# Altium PCB Offset_Attenuator.PcbDoc
Units mil, origin at the board's own origin, x right, y up, seen from the top; angles counter-clockwise.
Board outline 1968.5 x 2234.13 mil, 2 copper layers (M1 Top, M4 Bottom), stack 47.244 mil thick; 33 components, 14 nets, 81 pads, 37 vias.
Unrouted connection lines stored in the file: 11.
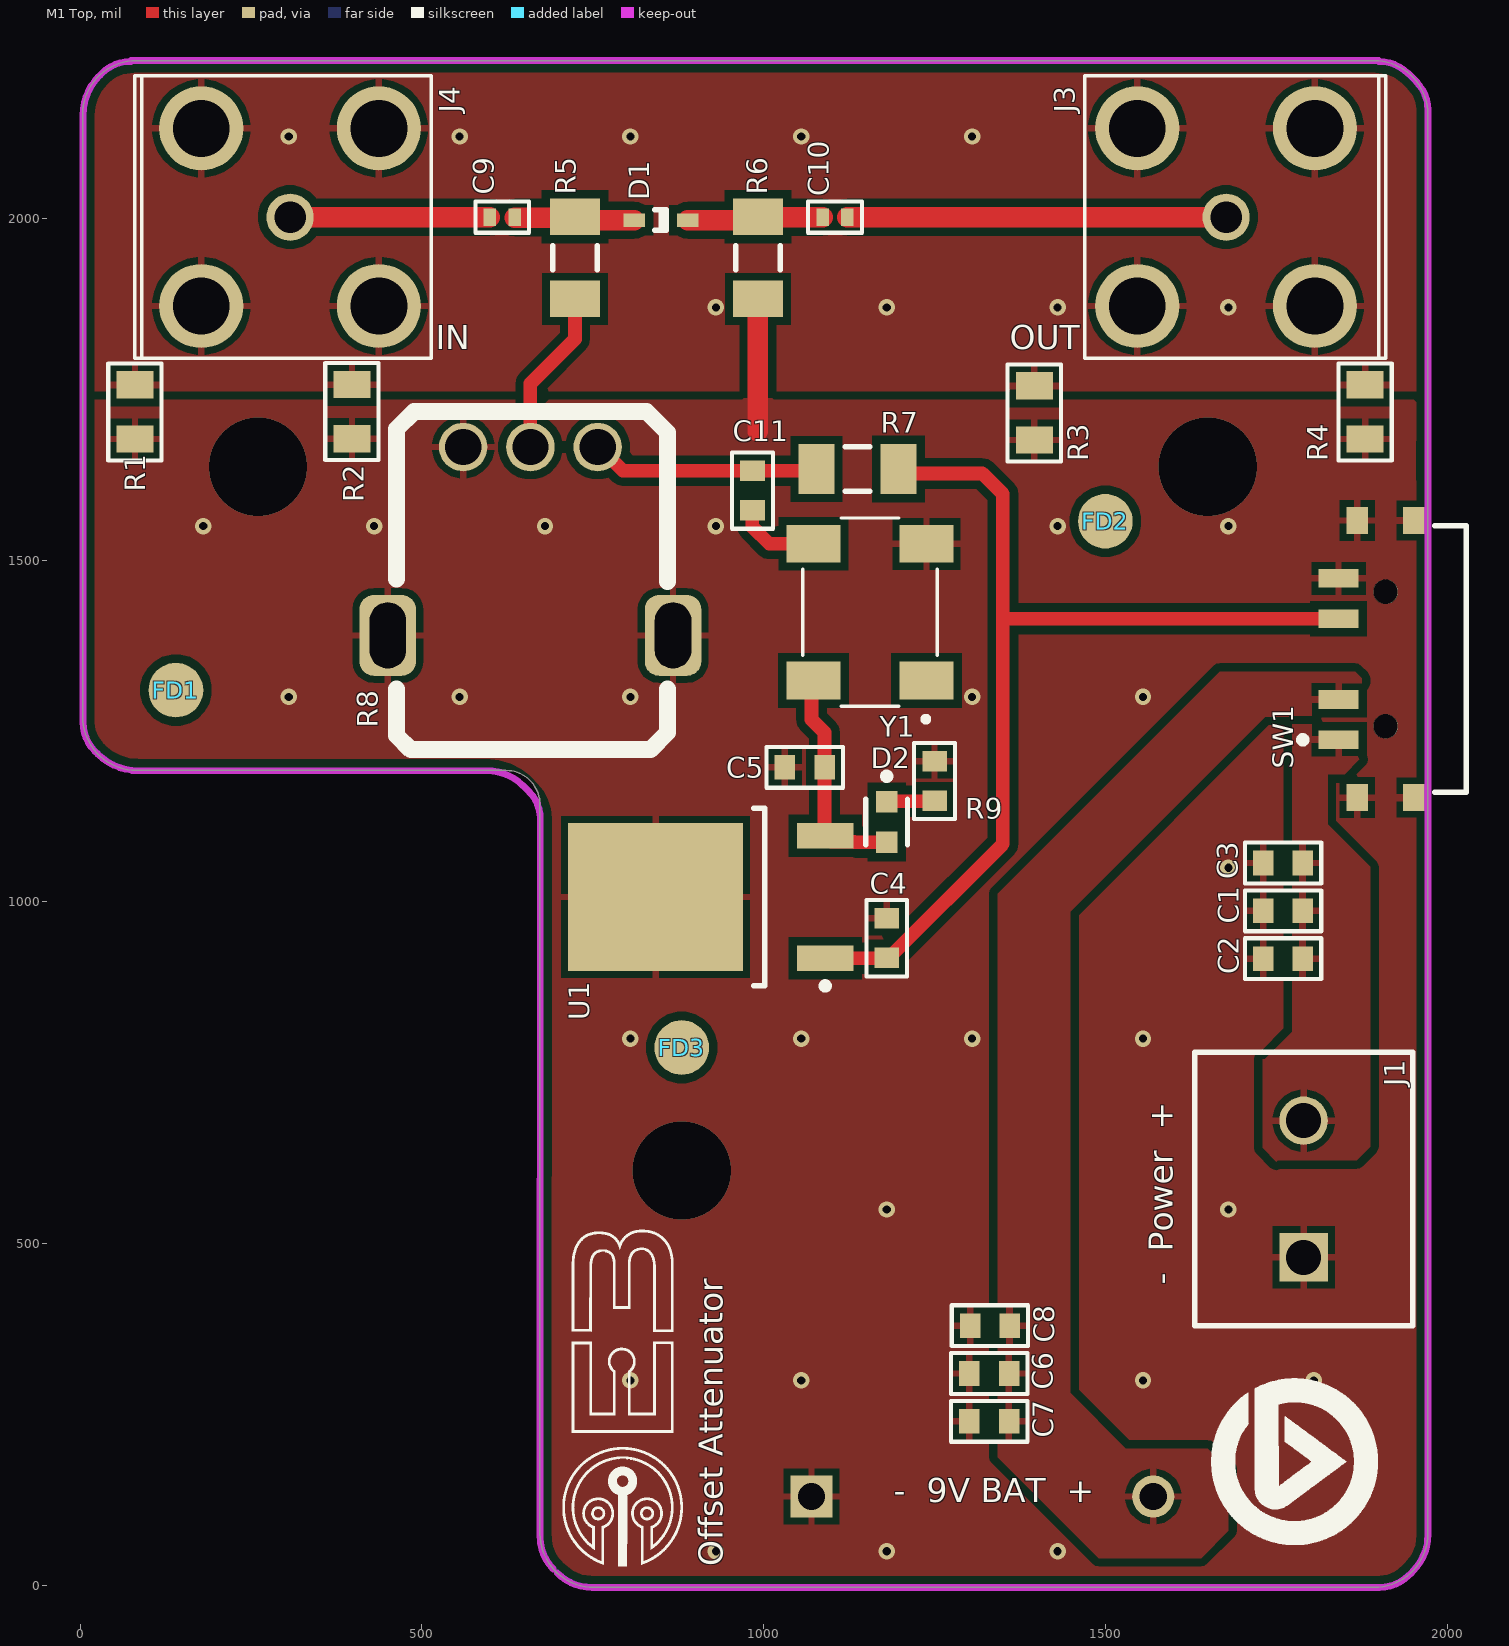
[diagram p0: M1 Top view]
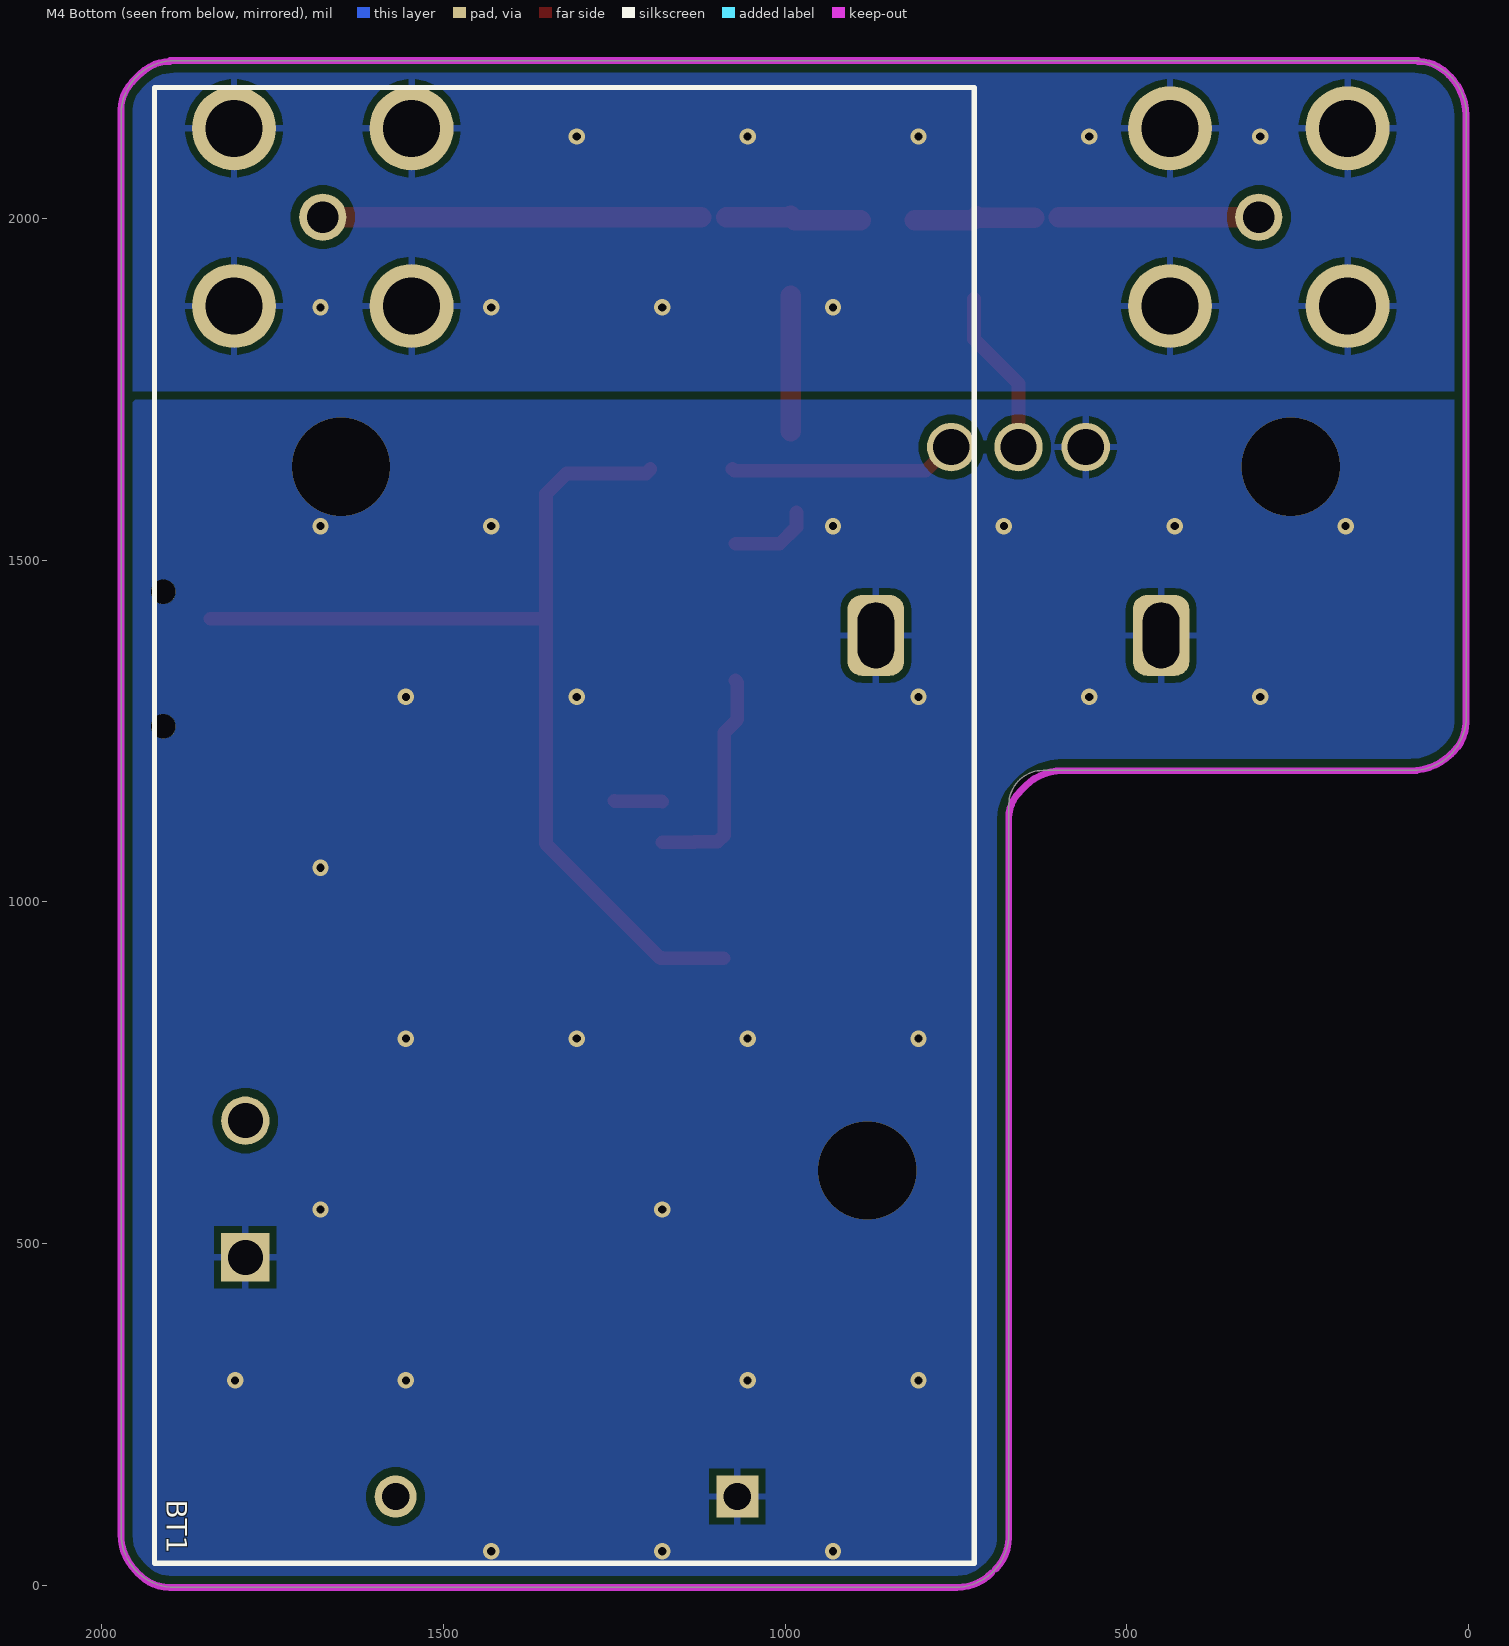
[diagram p1: M4 Bottom view, seen from below]
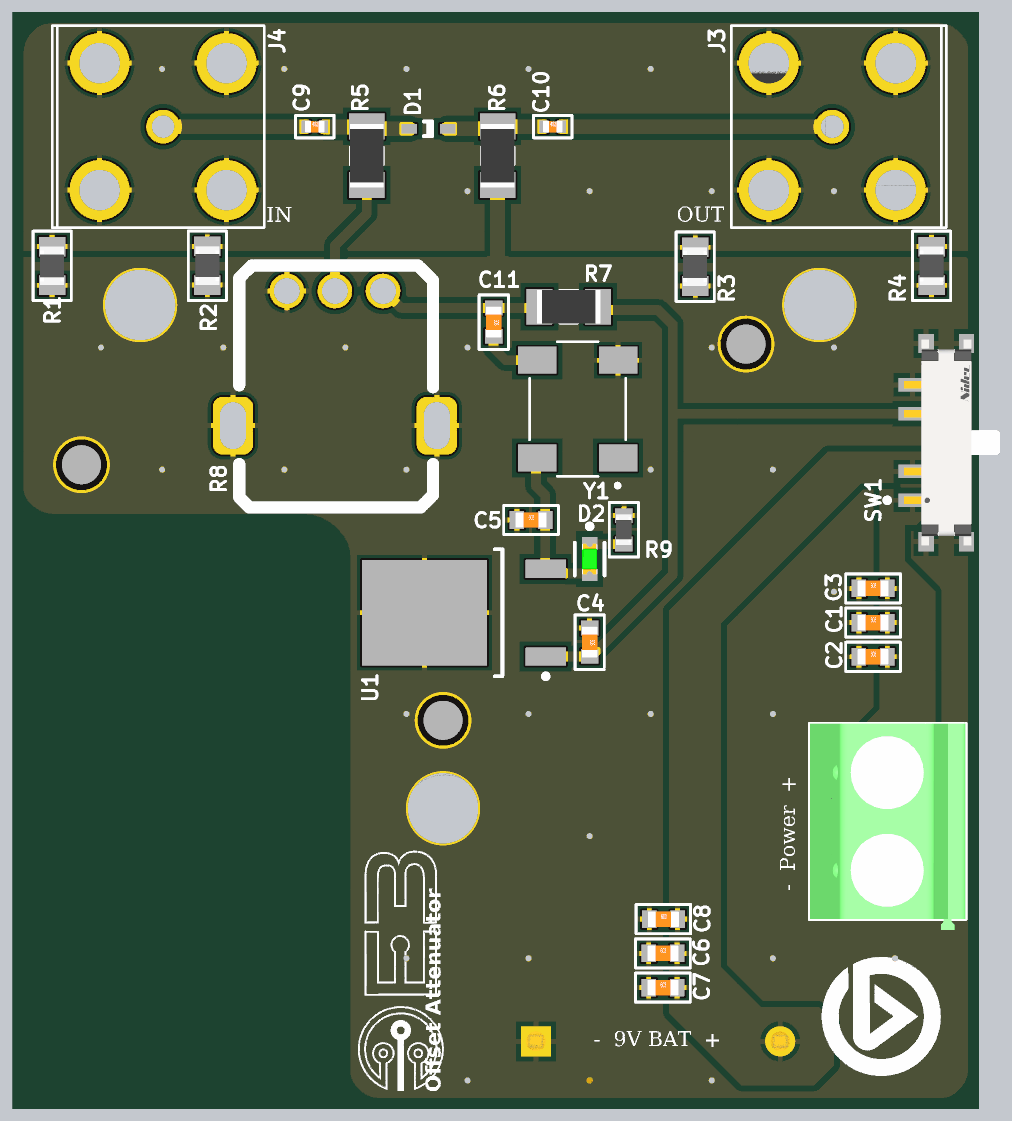
[diagram p2: 3D render of the assembled board from above, using the file's embedded part models]

## Layer stack, top to bottom
Top Solder: solder mask 0.4, Solder Resist, Dk 3.5
M1 Top: signal copper 1.378
Dielectric 2-3: dielectric 44.488, FR-4, Dk 3.96
M4 Bottom: signal copper 1.378
Bottom Solder: solder mask 0.4, Solder Resist, Dk 3.5

## Board outline
82.11,1192.51 622.66,1192.51 cw(c622.66,1142.51) 672.66,1142.51 672.66,75.74 ccw(c751.4,75.74) 751.4,-3 1893.13,-3 ccw(c1893.13,75.74) 1971.87,75.74 1971.87,2149 1971.87,2152.39 ccw(c1893.13,2152.39) 1893.13,2231.13 82.11,2231.13 ccw(c82.11,2152.39) 3.37,2152.39 3.37,2154 3.37,1271.25 ccw(c82.11,1271.25)

## Design rules (kind name [scope] priority, off if disabled: settings)
BoardOutlineClearance [All] p1: gap=10 ignorepadtopadclearanceinfootprint=FALSE except(5: Poly-OutlineEdge)
Clearance Clearance_Polygon [InPoly = TRUE] p1: gap=12 ignorepadtopadclearanceinfootprint=FALSE
Clearance Clearance_Polygon_50Ohm [InPoly = TRUE vs InNetClass('50 Ohm')] p2: gap=1 ignorepadtopadclearanceinfootprint=FALSE
Clearance [All] p3: gap=6 ignorepadtopadclearanceinfootprint=FALSE
HoleSize [All] p1: absolutevalues=TRUE maxlimit=5000 minlimit=12 maxpercent=80.000 minpercent=20.000
MinimumSolderMaskSliver [All] p1: minsoldermaskwidth=0
PlaneConnect [All] p1: pad.planeconnectstyle=Relief pad.reliefexpansion=20 pad.reliefentries=4 pad.reliefconductorwidth=10 pad.reliefairgap=10 via.planeconnectstyle=Direct via.reliefexpansion=20 via.reliefentries=4 via.reliefconductorwidth=10 via.reliefairgap=10
PolygonConnect [All] p1: thpad.connectstyle=Relief thpad.reliefconductorwidth=10 thpad.reliefentries=4 thpad.polygonreliefangle="90 Angle" thpad.airgapwidth=10 smdpad.connectstyle=Relief smdpad.reliefconductorwidth=10 smdpad.reliefentries=4 smdpad.polygonreliefangle="90 Angle" smdpad.airgapwidth=10 via.connectstyle=Direct via.reliefconductorwidth=10 via.reliefentries=4 via.polygonreliefangle="90 Angle" via.airgapwidth=10
RoutingVias [All] p1: holewidth=12 width=26 viastyle="Through Hole" minholewidth=12 minwidth=24 maxholewidth=5000 maxwidth=5000
SilkToSilkClearance [All] p1: silktosilkclearance=0.1
SilkToSolderMaskClearance [IsPad] p1: minsilkscreentomaskgap=0.1 clearancetoexposedcopper=TRUE
SolderMaskExpansion [All] p1: expansion=4 istentingtop=FALSE
Width [All] p1: maxlimit=5000 minlimit=6 preferedwidth=10
25 further rules are at their usual default settings.

## Classes and differential pairs
component class Offset_Attenuator: BT1 C1 C2 C3 C4 C5 C6 C7 C8 C9 C10 C11 D1 D2 J1 J3 J4 R1 R2 R3 R4 R5 R6 R7 R8 R9 SW1 U1 Y1
component class "[Top Sheet]": FD1 FD2 FD3

## Components (designator, comment, footprint, x,y, rotation, side; value= is the part's Value field where it differs from the comment)
BT1 "BH9VPC" FP-BH9VPC-MFG 1323,1112 r270 bottom
C1 "C0603" 0603CAP 1760,987 r0 top value=1uF
C2 "C0603" 0603CAP 1760,917 r0 top value=0.1uF
C3 "C0603" 0603CAP 1760,1057 r0 top value=0.1uF
C4 "C0603" 0603CAP 1180,947 r270 top value=1uF
C5 "C0603" 0603CAP 1060,1197 r0 top value=0.1uF
C6 "C0603" 0603CAP 1330,310 r0 top value=1uF
C7 "C0603" 0603CAP 1330,240 r0 top value=0.1uF
C8 "C0603" 0603CAP 1331,380 r0 top value=0.1uF
C9 "C0402" 0402cap 617.44,2002 r0 top value=470pF
C10 "C0402" 0402cap 1104.44,2002 r0 top value=470pF
C11 "C0603" 0603CAP 983.68,1601.96 r270 top value=0.0047uF
D1 "1N4148WT" FAIR-SOD-523F-2_V 849.83,1997.6 r180 top
D2 "LTST-C191KGKT" FP-LTST-C191KGKT-MFG 1180,1117 r270 top
FD1 "Fiducial Mark" "Fiducial Mark" 140,1310 r0 top
FD2 "Fiducial Mark" "Fiducial Mark" 1500,1557 r0 top
FD3 "Fiducial Mark" "Fiducial Mark" 880,787 r0 top
J1 "1729128" PHOE-1729128-2_V 1790,580 r90 top
J3 "5413631-1" 5413631-1 1676.6,2002 r90 top
J4 "5413631-1" 5413631-1 307,2002 r270 top
R1 "R0805" 0805RES 80,1717 r90 top value=0
R2 "R0805" 0805RES 397.49,1717.45 r90 top value=0
R3 "R0805" 0805RES 1396,1715.51 r90 top value=0
R4 "R0805" 0805RES 1880,1717 r90 top value=0
R5 "Resistor 0R +/- 5% 1206 250 mW" RESC3216X60X45ML15T20 723.84,1942.48 r90 top
R6 "Resistor 0R +/- 5% 1206 250 mW" RESC3216X60X45ML15T20 991.56,1942.48 r90 top
R7 "Resistor 0R +/- 5% 1206 250 mW" RESC3216X60X45ML15T20 1137.23,1633.46 r0 top
R8 "EVU-F2LFL3D53" EVU-F2LFL3D53 658.66,1527.8 r180 top
R9 "R0603" 0603RES 1250,1177 r90 top value=150
SW1 "CUS-13TB" FP-CUS-13TB-MFG 1939.53,1355.43 r90 top
U1 "L7805CDT-TR" TO-252_N 922.68,1007.24 r180 top
Y1 "ECS-3951M-040-BN-TR" OSC_ECS-3951M-040-BN-TR 1155.44,1424 r90 top
? "E3 Silk" "E3 Silk Screen" 792.58,277.7 r90 top

## Footprints (in the part's own frame and the unit in brackets; to place one, negate y for a bottom-side part, rotate by r counter-clockwise, add the part's x,y. Pads: shape width x height; smd on the part's side, far side on the other; paste and mask are expansions set on the pad)
0402cap [mm] "Chip Capacitor; Body 1.0 x 0.5 mm (LxW typ)"
  rect 0.47x0.64 smd: 1(-0.458,0) 2(0.458,0)
  silkscreen extent -1,-0.58 1,0.58, body extent -1,-0.58 1,0.58, height 0.2
0603CAP [mil] "Chip Capacitor; Body 1.6 x 0.8 mm (LxW typ)"
  rect 30x35.98 smd: 1(-29,0) 2(29,0)
  silkscreen extent -56,-30 56,30, body extent -56,-30 56,30, height 12
0603RES [mil] "Chip Resistor; Body 1.6 x 0.8 mm (LxW typ)"
  rect 30x35.98 smd: 1(-29,0) 2(29,0)
  silkscreen extent -56,-30 56,30, body extent -56,-30 56,30, height 15
0805RES [mil] "Chip Resistor Body 2.0 x 1.2 mm (LxW typ)"
  rect 40x54 smd: 1(-39.6,0) 2(39.6,0)
  silkscreen extent -71,-39 71,39, body extent -71,-39 71,39, height 19
5413631-1 [mm]
  round 3.126 hole 2.11: G1(-3.3,3.3) G2(3.3,3.3) G3(-3.3,-3.3) G4(3.3,-3.3)
  round 1.755 hole 1.17: RF(0,0)
  silkscreen extent -5.25,-5.93 5.25,5.25
"E3 Silk Screen" [mil]
  silkscreen extent -250,-89 242,87
EVU-F2LFL3D53 [mm] "EVU-F2LFL3D53"
  round 1.8 hole 1.35: 1(-2.5,-3.5) 2(0,-3.5) 3(2.5,-3.5)
  rrect50% 2.1x3 hole 1.35 slot 2.45 at 90 deg: ""(-5.3,3.5) ""(5.3,3.5)
  silkscreen extent -5.1,-4.83 4.97,7.75
FAIR-SOD-523F-2_V [mm] "SMD, 2-Leads, Body 1.2x0.8mm, Height 0.7mm"
  rect 0.8x0.5 smd: 1(-1,0) 2(1,0)
  silkscreen extent -0.2,-0.38 0.24,0.38, body extent -0.6,-0.4 0.6,0.4, height 0.71
"Fiducial Mark" [mil] "Fiducial Mark"
  round 80 smd mask+18: 0(0,0)
FP-BH9VPC-MFG [mil]
  rect 61.65x61.65 hole 40 paste-99999 mask+0: 1(982,253)
  round 61.65 hole 40 paste-99999 mask+0: 2(982,-247)
  silkscreen extent -1080,-600 1080,600, body extent -1070,-590 1070,590, height 812
FP-CUS-13TB-MFG [mm]
  rect 0.7x1.5 smd paste+0 mask+0: 1(-3,2.5) 2(-1.5,2.5) 3(1.5,2.5) 4(3,2.5)
  rect 1x0.8 smd paste+0 mask+0: 5(-5.15,1.8) 6(5.15,1.8) 7(-5.15,-0.3) 8(5.15,-0.3)
  round 0.9 hole 0.9 unplated paste-2539.97 mask+0: ""(-2.5,0.75) ""(2.5,0.75)
  silkscreen extent -4.95,-2.25 4.95,3.95, body extent -5.75,-2.35 5.75,3.35, height 0.25
FP-LTST-C191KGKT-MFG [mm]
  rect 0.8x0.8 smd paste+0 mask+0: 1(-0.75,0) 2(0.75,0)
  silkscreen extent -1.82,-0.77 0.85,0.77, body extent -1.25,-0.55 1.25,0.55, height 0.25
OSC_ECS-3951M-040-BN-TR [mm]
  rect 1.4x2 smd: 1(-2.54,-2.1) 2(2.54,-2.1) 3(2.54,2.1) 4(-2.54,2.1)
  silkscreen extent -4.08,-2.5 3.5,2.5
PHOE-1729128-2_V [mm] "Receptacle, 2-Leads, Body 8.1x10.16mm, Pitch 5.08mm"
  rect 1.8x1.8 hole 1.3: 1(-2.54,0)
  round 1.8 hole 1.3: 2(2.54,0)
  silkscreen extent -5.08,-4.05 5.08,4.05, body extent -5.65,-4.05 5.08,4.05, height 10.01
RESC3216X60X45ML15T20 [mm] "Chip Resistor, 2-Leads, Body 3.3x1.75mm, IPC Low Density"
  rect 1.35x1.85 smd: 1(-1.525,0) 2(1.525,0)
  silkscreen extent -0.45,-0.82 0.45,0.82, body extent -1.65,-0.87 1.65,0.87, height 0.6
TO-252_N [mm] "D-PAK, 4-Leads, Body 6.1x6.5mm, Pitch 2.28mm, Lead Span 9.7mm, IPC Medium Density"
  rect 2.1x0.95 smd: 1(-4.25,2.28) 3(-4.25,-2.28)
  rect 6.5x5.5 smd: 4(2.05,0)
  silkscreen extent -4.38,-3.3 -1.6,3.43, body extent -2,-3.3 4.2,3.3, height 2.4

## Part data
BT1: library part CMP-136216-000001-1, "BATTERY HOLDER 9V PC PIN", Manufacturer="Memory Protection Devices", Package=0, Voltage Rating=9V, Automotive=No, Category=Batt, ComponentLink2Description=Datasheet, ComponentLink2URL=http://www.memoryprotectiondevices.com/datasheets/BH9VPC-datasheet.pdf, Conn Orientation=Vertical, Contact Material=Nickel, Device Class L1=Connectors, Device Class L2=unset, Device Class L3=unset, Digikey Description="BATTERY HOLDER 9V PC PIN", Height=21.12mm, Is Female=yes, Lead Free=Yes, Manufacturer Part Number=BH9VPC, Number Of Contacts=2, Octopart=https://octopart.com/bh9vpc-memory+protection+devices-22788154, ROHS=TRUE
C1 C2 C3 C4 C5 C6 C7 C8 C11: "0603 Ceramic Chip Capacitor - Standard"
C9 C10: "0402 Ceramic Chip Capacitor - Standard"
D1: library part CMP-0881-00001-1, "High Conductance Fast Switching Diode, 75 V, -55 to 150 degC, 2-Pin SOD523F, RoHS", Manufacturer="Fairchild Semiconductor", Temperature Range="-55 to 150 degC", BVR (IR="5 uA)=75 V Min.", CO="4 pF Max.", ComponentLink1Description="Manufacturer URL", ComponentLink1URL=http://www.fairchildsemi.com/, ComponentLink2Description=Datasheet, ComponentLink2URL=http://www.fairchildsemi.com/ds/1N/1N4148WT.pdf, DatasheetVersion="Rev. A2", IR (VR="75 V)=5 uA Max.", Mounting Technology="Surface Mount", PackageDescription="2-Pin Surface Mount Device, Body 1.2 x 0.8 mm, Height 0.7 mm", PackageReference=SOD-523F-2, PartNumber=1N4148WT, ROHS=TRUE, VF="1 V Max."
D2: library part CMP-2000-05198-2, "LED GREEN CLEAR SMD", Case Code (Imperial)=0603, Case Code (Metric)=1608, Color=Green, Forward Current=30mA, Forward Voltage=2V, Lens Color=Colorless, Max Operating Temperature=85°C, Max Power Dissipation=75mW, Min Operating Temperature=-55°C, Package Quantity=1, Reverse Voltage=5V, Test Current=20mA, Case/Package=0603, Depth=0.8mm, Dominant Wavelength=571nm, Height=0.55mm, Illumination Color=Green, Lead Free="Lead Free", Length=1.6mm, Lens Style=Rectangular, Lens Transparency=Clear, Luminous Intensity=35mcd, Mount="Surface Mount", Number of Elements=1, Number of LEDs=1, Number of Pins=2, Packaging="Tape and Reel", Power Dissipation=75mW, Power Rating=75mW, Radiation Hardening=No, Viewing Angle=130°, Wavelength=574nm, Width=0.8mm
FD1 FD2 FD3: Manufacturer=Custom, Manufacturer P/N="Fiducial Mark", Vendor=Custom, Vendor P/N="Fiducial Mark"
J1: library part CMP-002-00071-1, "Block, Terminal; 13.5 A; 250 V; 5.08 mm; 26 to 16 AWG; 2; Screw; Solder; 4 kV"
J3 J4: "Nickel Plating 50 Ohm Right Angle Metalized Jack PCB BNC Connector", Package=None, Availability=Unavailable, EU_RoHS_Compliance="Compliant with Exemptions", MF="TE Connectivity", MP=5413631-1, Number_of_Positions=1, Price=None, SnapEDA_Link=https://www.snapeda.com/parts/5413631-1/TE%20Connectivity%20AMP%20Connectors/view-part/463831/?ref=snap, TE_purchase_URL=https://www.te.com/usa-en/product-5413631-1.html?te_bu=Cor&te_type=disp&te_campaign=seda_glo_cor-seda-global-disp-prtnr-fy19-seda-model-bom-cta_sma-317_1&elqCampaignId=32493
R1 R2 R3 R4: "0805 Chip Resistor - Standard"
R5 R6 R7: library part CMP-009-00002-5, "Chip Resistor, 0 Ohm, +/- 5%, 0.25 W, -55 to 155 degC, 1206 (3216 Metric)", Case/Package=1206, Max Operating Temperature=155°C, Min Operating Temperature=-55°C, Power=250mW, Tolerance=5%, Voltage Rating=200V, Mounting Technology=SM, Pins=2, RoHS Compliant=True
  R5 R6: CR1206F2K20P05Z=2.2k
  R7: RMC12064.7K5%N=4.7k
R9: "0603 Chip Resistor - Standard"
SW1: library part CMP-71745-000014-1, "SWITCH SLIDE SP3T 300MA 4V", Current Rating=300mA, Max Operating Temperature=70°C, Max Voltage Rating (DC)=20V, Min Operating Temperature=-20°C, Voltage Rating (DC)=4V, Actuator Length=1.5mm, Actuator Material=Nylon, Actuator Type=Standard, Contact Material="Copper Alloy", Contact Plating=Gold, Contact Style=Non-Shorting, Electrical Life=10000Cycles, Mount="Surface Mount", Orientation="Right Angle", Packaging="Tape and Reel", Radiation Hardening=No, RoHS Compliant=Yes, Series=CUS, Switch Function=On-On-On, Switch Travel=1.5mm, Termination="Gull Wing", Throw Configuration=SP3T
U1: library part CMP-0244-00216-1, "Positive Voltage Regulator, 3-Pin DPAK, Tape and Reel", ComponentLink1Description="Manufacturer URL", ComponentLink1URL=http://www.st.com, ComponentLink2Description=Datasheet, ComponentLink2URL=http://www.st.com/internet/com/TECHNICAL_RESOURCES/TECHNICAL_LITERATURE/DATASHEET/CD00000444.pdf, DatasheetVersion=16/11/2011, PackageDescription="3-Pin Transistor Outline Package 2.28 mm Pitch, 9.7 mm Lead Span (DPAK)", PackageReference=TO-252, PackageVersion=2011
Y1: "SMD CLOCK OSCILLATOR", Package=None, Availability=Unavailable, MP=ECS-3951M-040-BN-TR, Price=None

## Via types
v1: diameter 24, hole 12, M1 Top to M4 Bottom, tented both sides, 34 vias
v2: diameter 144, hole 144, M1 Top to M4 Bottom, 3 vias

## Nets (pads, with @x,y where several pads share a name; then routed paths per layer and width w, separated by ;. In a path a pad name is that pad's centre, name@x,y a point inside that pad or via, vN(x,y) a via of type N, cw(c..) or ccw(c..) an arc to the next point about the centre after c; other vN are vias at no path point)
9VBAT: BT1.2 C6.2 C7.2 C8.2 SW1.2
+5V0: C5.2 D2.2 U1.3 Y1.4 | length 330.4
  M1 Top w20: Y1.4 1070,1321.23 1070,1267 1089,1248 C5.2 1089,1098 1098.7,1088.3 1132.23,1088.3 1133.05,1087.47 D2.2
GND: BT1.1 C1.1 C2.1 C3.1 C4.1 C5.1 C6.1 C7.1 C8.1 J1.1 R1.1 R2.1 R3.1 R4.1 R6.1 R8. R8.3 R9.2 SW1. SW1.4 SW1.5 SW1.6 SW1.7 SW1.8 U1.4 Y1.2 | length 198.4
  M1 Top w30: 991.56,1688.57 R6.1 R6.1@991.56,1887
  other v1: 930,50 1180,50 1430,50 805,300 1055,300 1555,300 1805,300 1180,550 1680,550 805,800 1055,800 1305,800 1555,800 1680,1050 305,1300 555,1300 805,1300 1305,1300 1555,1300 180,1550 430,1550 680,1550 930,1550 1430,1550 1680,1550
  other v2: 880,607 260,1637 1650,1637
GND_RF: J3.G1 J3.G2 J3.G3 J3.G4 J4.G1 J4.G2 J4.G3 J4.G4 R1.2 R2.2 R3.2 R4.2
  other v1: 930,1870 1180,1870 1430,1870 1680,1870 305,2120 555,2120 805,2120 1055,2120 1305,2120
NetC9_2: C9.2 D1.2 R5.2 | length 177.4
  M1 Top w30: C9.2@635.49,2001.37 R5.2@719.44,2001.37 ; R5.2@719.44,2003.37 725.22,1997.6 D1.2
NetC10_1: C10.1 D1.1 R6.2 | length 199.8
  M1 Top w30: D1.1 985.68,1997.6 R6.2@992.08,2004 ; R6.2@992.08,2002 C10.1
NetC11_1: C11.1 R7.1 R8.1 | length 335.5
  M1 Top w20: R8.1 759.61,1665.59 794.24,1630.96 1074.69,1630.96 R7.1
NetD2_1: D2.1 R9.1 | length 70.6
  M1 Top w20: D2.1 1180.74,1147.26 1249.26,1147.26 R9.1
NetR5_1: R5.1 R8.2 | length 243.8
  M1 Top w20: R8.2 658.66,1758.66 723.84,1823.84 R5.1
OUT_4M: C11.2 Y1.3 | length 121.2
  M1 Top w20: C11.2@983.4,1570.28 983.4,1548.69 1008.09,1524 Y1.3
RF_IN: C9.1 J4.RF | length 292.4
  M1 Top w30: J4.RF C9.1
RF_OUT: C10.2 J3.RF | length 554.1
  M1 Top w30: C10.2 J3.RF
Vbanana: C1.2 C2.2 C3.2 J1.2 SW1.1
Vcc: C4.2 R7.2 SW1.3 U1.1 | length 1500.3
  M1 Top w20: U1.1 1090.26,917.74 1179.74,917.74 C4.2 1182.99,918 1350,1085.01 1350,1414.48 ; R7.2 1203.72,1627 1320,1627 1350,1597 1350,1414.48 ; SW1.3 1350,1414.48
pads on no net: FD1.0 FD2.0 FD3.0 Y1.1

## Polygon pours and split planes (outlines as drawn)
GND on M1 Top "NONET_L-01_P-001" (solid, pour order 9): 0,1737 1975,1737 1975,-3 0,-3
Vbanana on M1 Top "VBANANA_L01_P000" (solid, pour order 0): 1773.21,810 1733.21,770 1730,770 1730,640 1750,620 1752.01,622.01 1797.55,622.01 1867.55,622.01 1887.56,642.01 1887.56,1051.22 1825,1113.77 1825,1187 1850,1187 1875,1212 1875,1237 1851.79,1260.21 1773.21,1260.21
GND_RF on M1 Top "GND_RF_L01_P005" (solid, remove dead copper, pour order 5): 3.37,1747 1971.87,1747 1971.87,2227.94 1956.13,2243.69 3.37,2243.69
9VBAT on M1 Top "9VBAT_L01_P001" (solid, pour order 1): 1342.2,644.8 1342.2,187.8 1490,40 1640,40 1680,80 1680,170 1650,200 1530,200 1448.5,281.5 1448.5,985.5 1734.25,1271.25 1861.25,1271.25 1875,1285 1875,1327.23 1865.23,1337 1667,1337 1342.2,1012.2
GND on M4 Bottom "NONET_L-01_P-001" (solid, pour order 10): 0,1737 1975,1737 1975,-3 0,-3
GND_RF on M4 Bottom "GND_RF_L02_P002" (solid, remove dead copper, pour order 2): 3.37,1747 1971.87,1747 1971.87,2227.94 1956.13,2243.69 3.37,2243.69

## Keep-outs
Keep-Out Layer:
  lines w10: 4,2151.06 cw(c85.94,2151.06) 28,2209 ; 4,2152 4,1263 ccw(c64.36,1263) 21.68,1220.32 25,1217 ccw(c85.36,1277.36) 85.36,1192 595,1192 cw(c595,1117.16) 647.92,1170.08 657,1161 cw(c618.37,1122.37) 673,1122.37 672.79,70 ; 26,2207 29.32,2210.32 ; 31.32,2212.32 cw(c74,2169.64) 74,2230 ; 74,2231 1900,2231 ; 673,70 ccw(c738.18,70) 692.09,23.91 ; 698,18 ccw(c748.7,68.7) 748.7,-3 1901,-3 ccw(c1901,57.36) 1943.68,14.68 ; 1900,2230 cw(c1900,2169.64) 1942.68,2212.32 ; 1942.07,12.85 1948.4,19.17 ; 1943.68,2212.32 1956.03,2199.97 ; 1950,21 ccw(c1896.89,74.11) 1972,74.11 1972,1617 ; 1955.03,2199.97 cw(c1914.06,2159) 1972,2159 ; 1971.8,1617 1972,2161

## Other copper
M1 Top:
  text ".layer_name" at 1347,-599.67 h40
M4 Bottom:
  text ".layer_name" at 1347,-603 h40

## Silkscreen, mask and mechanical layers (free items; w line width, h text height)
Top Overlay:
  drawing of 2 lines, arcs and shapes, not listed
  text "IN" at 520,1797 h60
  text "OUT" at 1360,1797 h60
  text "-  Power  +" at 1610,440 h60 r90
  text "-  9V BAT  +" at 1190,110 h60
  text "Offset Attenuator" at 951.56,27.74 h60 r90
Drill Drawing:
  circle w3: c2183.57,1236.67 r9.78
  lines w3: 2173.79,1055.81 2178.68,1055.81 2183.57,1050.92 2188.45,1055.81 2193.34,1055.81 2188.45,1060.7 2193.34,1065.59 2188.45,1065.59 2183.57,1070.48 2178.68,1065.59 2173.79,1065.59 2178.68,1060.7 2173.79,1055.81 ; 2173.79,1094.92 2173.79,1099.8 2178.68,1104.69 2173.79,1109.58 2173.79,1114.47 2178.68,1114.47 2183.57,1109.58 2188.45,1114.47 2193.34,1114.47 2193.34,1109.58 2188.45,1104.69 2193.34,1099.8 2193.34,1094.92 2188.45,1094.92 2183.57,1099.8 2178.68,1094.92 2173.79,1094.92 ; 2173.79,1138.91 2183.57,1143.79 2193.34,1138.91 2188.45,1148.68 2193.34,1158.46 2183.57,1153.57 2173.79,1158.46 2178.68,1148.68 2173.79,1138.91 ; 2173.79,1187.79 2178.68,1187.79 2178.68,1182.9 2188.45,1182.9 2188.45,1187.79 2193.34,1187.79 2193.34,1197.56 2188.45,1197.56 2188.45,1202.45 2178.68,1202.45 2178.68,1197.56 2173.79,1197.56 2173.79,1187.79 ; 2173.79,1290.43 2193.34,1290.43 2183.57,1270.88 2173.79,1290.43 ; 2173.79,1314.87 2193.34,1314.87 2193.34,1334.42 2173.79,1334.42 2173.79,1314.87 ; 2173.79,1358.86 2193.34,1358.86 2193.34,1378.42 2173.79,1378.42 2173.79,1358.86 ; 2177.7,1318.78 2189.43,1318.78 2189.43,1330.51 2177.7,1330.51 2177.7,1318.78
  lines w15: 2156.23,1037.73 5421.16,1037.73 ; 2156.23,1389.66 5421.16,1389.66 ; 2318.01,993.73 2318.01,1433.65 ; 2476.47,993.73 2476.47,1433.65 ; 2813.77,993.73 2813.77,1433.65 ; 2962.35,993.73 2962.35,1433.65 ; 3177.77,993.73 3177.77,1433.65 ; 3526.89,993.73 3526.89,1433.65 ; 3700.09,993.73 3700.09,1433.65 ; 4019.8,993.73 4019.8,1433.65 ; 4374.7,993.73 4374.7,1433.65 ; 4625.3,993.73 4625.3,1433.65 ; 5016.63,993.73 5016.63,1433.65 ; 2156.23,993.73 5421.16,993.73 5421.16,1433.65 2156.23,1433.65 2156.23,993.73
  text "Symbol" at 2182.63,1402.86 h21.12
  text "Count" at 2331.2,1402.86 h21.12
  text "Hole Size" at 2489.67,1402.86 h21.12
  text "Plated" at 2826.97,1402.86 h21.12
  text "Hole Type" at 2975.55,1402.86 h21.12
  text "Drill Layer Pair" at 3190.97,1402.86 h21.12
  text "Via/Pad" at 3540.08,1402.86 h21.12
  text "Pad Shape" at 3713.29,1402.86 h21.12
  text "Template" at 4033,1402.86 h21.12
  text "Description" at 4387.89,1402.86 h21.12
  text "Hole Tolerance (+)" at 4638.5,1402.86 h21.12
  text "Hole Tolerance (-)" at 5029.83,1402.86 h21.12
  text "2" at 2331.2,1358.86 h17.6
  text "35.43mil (0.900mm)" at 2489.67,1358.86 h17.6
  text "NPTH" at 2826.97,1358.86 h17.6
  text "Round" at 2975.55,1358.86 h17.6
  text "M1 Top - M4 Bottom" at 3190.97,1358.86 h17.6
  text "Pad" at 3540.08,1358.86 h17.6
  text "Rounded" at 3713.29,1358.86 h17.6
  text "c90hn90m90p0" at 4033,1358.86 h17.6
  text "2" at 2331.2,1314.87 h17.6
  text "40.00mil (1.016mm)" at 2489.67,1314.87 h17.6
  text "PTH" at 2826.97,1314.87 h17.6
  text "Round" at 2975.55,1314.87 h17.6
  text "M1 Top - M4 Bottom" at 3190.97,1314.87 h17.6
  text "Pad" at 3540.08,1314.87 h17.6
  text "(Mixed)" at 3713.29,1314.87 h17.6
  text "(Mixed)" at 4033,1314.87 h17.6
  text "2" at 2331.2,1270.88 h17.6
  text "46.06mil (1.170mm)" at 2489.67,1270.88 h17.6
  text "PTH" at 2826.97,1270.88 h17.6
  text "Round" at 2975.55,1270.88 h17.6
  text "M1 Top - M4 Bottom" at 3190.97,1270.88 h17.6
  text "Pad" at 3540.08,1270.88 h17.6
  text "Rounded" at 3713.29,1270.88 h17.6
  text "c176h117" at 4033,1270.88 h17.6
  text "2" at 2331.2,1226.89 h17.6
  text "51.18mil (1.300mm)" at 2489.67,1226.89 h17.6
  text "PTH" at 2826.97,1226.89 h17.6
  text "Round" at 2975.55,1226.89 h17.6
  text "M1 Top - M4 Bottom" at 3190.97,1226.89 h17.6
  text "Pad" at 3540.08,1226.89 h17.6
  text "(Mixed)" at 3713.29,1226.89 h17.6
  text "(Mixed)" at 4033,1226.89 h17.6
  text "2" at 2331.2,1182.9 h17.6
  text "53.15mil (1.350mm)" at 2489.67,1182.9 h17.6
  text "PTH" at 2826.97,1182.9 h17.6
  text "Slot" at 2975.55,1182.9 h17.6
  text "M1 Top - M4 Bottom" at 3190.97,1182.9 h17.6
  text "Pad" at 3540.08,1182.9 h17.6
  text "Rounded Rectangle" at 3713.29,1182.9 h17.6
  text "r300_210h135_245r50" at 4033,1182.9 h17.6
  text "3" at 2331.2,1138.91 h17.6
  text "53.15mil (1.350mm)" at 2489.67,1138.91 h17.6
  text "PTH" at 2826.97,1138.91 h17.6
  text "Round" at 2975.55,1138.91 h17.6
  text "M1 Top - M4 Bottom" at 3190.97,1138.91 h17.6
  text "Pad" at 3540.08,1138.91 h17.6
  text "Rounded" at 3713.29,1138.91 h17.6
  text "c180h135" at 4033,1138.91 h17.6
  text "3" at 2331.2,1094.92 h17.6
  text "144.00mil (3.658mm)" at 2489.67,1094.92 h17.6
  text "PTH" at 2826.97,1094.92 h17.6
  text "Round" at 2975.55,1094.92 h17.6
  text "M1 Top - M4 Bottom" at 3190.97,1094.92 h17.6
  text "Via" at 3540.08,1094.92 h17.6
  text "Rounded" at 3713.29,1094.92 h17.6
  text "v366h366" at 4033,1094.92 h17.6
  text "8" at 2331.2,1050.92 h17.6
  text "83.07mil (2.110mm)" at 2489.67,1050.92 h17.6
  text "PTH" at 2826.97,1050.92 h17.6
  text "Round" at 2975.55,1050.92 h17.6
  text "M1 Top - M4 Bottom" at 3190.97,1050.92 h17.6
  text "Pad" at 3540.08,1050.92 h17.6
  text "Rounded" at 3713.29,1050.92 h17.6
  text "c313h211" at 4033,1050.92 h17.6
  text "24 Total" at 2331.2,1006.93 h17.6
  text "Slot definitions :" at 2182.63,964.28 h17.6
  text "Routed Path Length" at 2485.68,964.28 h17.6
  text "= Calculated from tool start centre position to tool end centre position." at 2809.25,964.28 h17.6
  text "Hole Length" at 2485.68,934.83 h17.6
  text "= Routed Path Length + Tool Size = Slot length as defined in the PCB layout" at 2689.05,934.83 h17.6
Board Outline:
  lines w10: 3.37,2152.39 cw(c82.11,2152.39) 82.11,2231.13 1893.13,2231.13 cw(c1893.13,2152.39) 1971.87,2152.39 ; 3.37,2154 3.37,1271.25 ccw(c82.11,1271.25) 82.11,1192.51 593.92,1192.51 622.66,1192.51 cw(c622.66,1142.51) 672.66,1142.51 672.66,1113.77 672.66,75.74 ccw(c751.4,75.74) 751.4,-3 1893.13,-3 ccw(c1893.13,75.74) 1971.87,75.74 1971.87,2149
Fabrication:
  drawing of 226 lines, arcs and shapes, not listed
  text "Layer" at 2201.31,2174.45 h42.87
  text "Name" at 2499.91,2174.45 h42.87
  text "Material" at 3169.94,2174.45 h42.87
  text "Thickness" at 3789.97,2174.45 h42.87
  text "Constant" at 4260,2174.45 h42.87
  text "Board Layer Stack" at 4672.89,2174.45 h42.87
  text "Top Overlay" at 2499.91,2088.71 h42.87
  text "Top Solder" at 2499.91,2002.97 h42.87
  text "Solder Resist" at 3169.94,2002.97 h42.87
  text "0.40mil" at 3789.97,2002.97 h42.87
  text "3.5" at 4260,2002.97 h42.87
  text "1" at 2201.31,1917.23 h42.87
  text "M1 Top" at 2499.91,1917.23 h42.87
  text "1.38mil" at 3789.97,1917.23 h42.87
  text "Dielectric 2-3" at 2499.91,1831.48 h42.87
  text "FR-4" at 3169.94,1831.48 h42.87
  text "44.49mil" at 3789.97,1831.48 h42.87
  text "3.96" at 4260,1831.48 h42.87
  text "2" at 2201.31,1745.74 h42.87
  text "M4 Bottom" at 2499.91,1745.74 h42.87
  text "1.38mil" at 3789.97,1745.74 h42.87
  text "Bottom Solder" at 2499.91,1660 h42.87
  text "Solder Resist" at 3169.94,1660 h42.87
  text "0.40mil" at 3789.97,1660 h42.87
  text "3.5" at 4260,1660 h42.87
  text "Bottom Overlay" at 2499.91,1574.26 h42.87
  text "Total board thickness:" at 2201.31,1488.52 h42.87
  text "48.04mil" at 3789.97,1488.52 h42.87
  text "FABRICATION NOTES" at 2170,776 h78.74
  text "1) FABRICATE TO THE 'PCB SPECIFICATION SELECTION' ENTERED ON THE WEBSITE. /  / 2) SUBSTITUTION OF DEFAULT MANUFACTURER STACKUP OF INDICATED LAYER COUNT IS ACCEPTABLE. /  / 3) NO IMPEDANCE CONTROL" at 2142,183 h40
  text "'.project_name'" at 1056.86,-210.26 h59.06
  text "PROJECT" at 705.48,-218.77 h66.93
  text "ID" at 705.48,-285.7 h66.93
  text "DATE" at 705.48,-351.65 h66.93
  text ".Print_Date .Print_Time" at 1056.86,-351.65 h59.06
  text "VARIANT" at 705.48,-417.59 h66.93
  text "'.VariantName'" at 1056.86,-417.59 h59.06
  text "TYPE HERE" at 1056.86,-482.55 h59.06
  text "ENGINEER" at 705.48,-483.54 h66.93
  text "LAYER" at 1325.56,-549.48 h66.93
  text "FILE" at -511.06,-616.41 h66.93
  text "'.Pcb_File_Name_No_Path'" at -364.4,-616.41 h59.06
  text "CONFIDENTIAL" at -511.06,-660.7 h39.37